# Altium PCB LOAD CONTROL_Final2.PcbDoc (part 2 of 2)
Units mil, origin at the board's own origin, x right, y up, seen from the top; angles counter-clockwise.
Board outline 2032.89 x 4209.34 mil, 2 copper layers (Top Layer, Bottom Layer); 80 components, 51 nets, 252 pads, 95 vias.
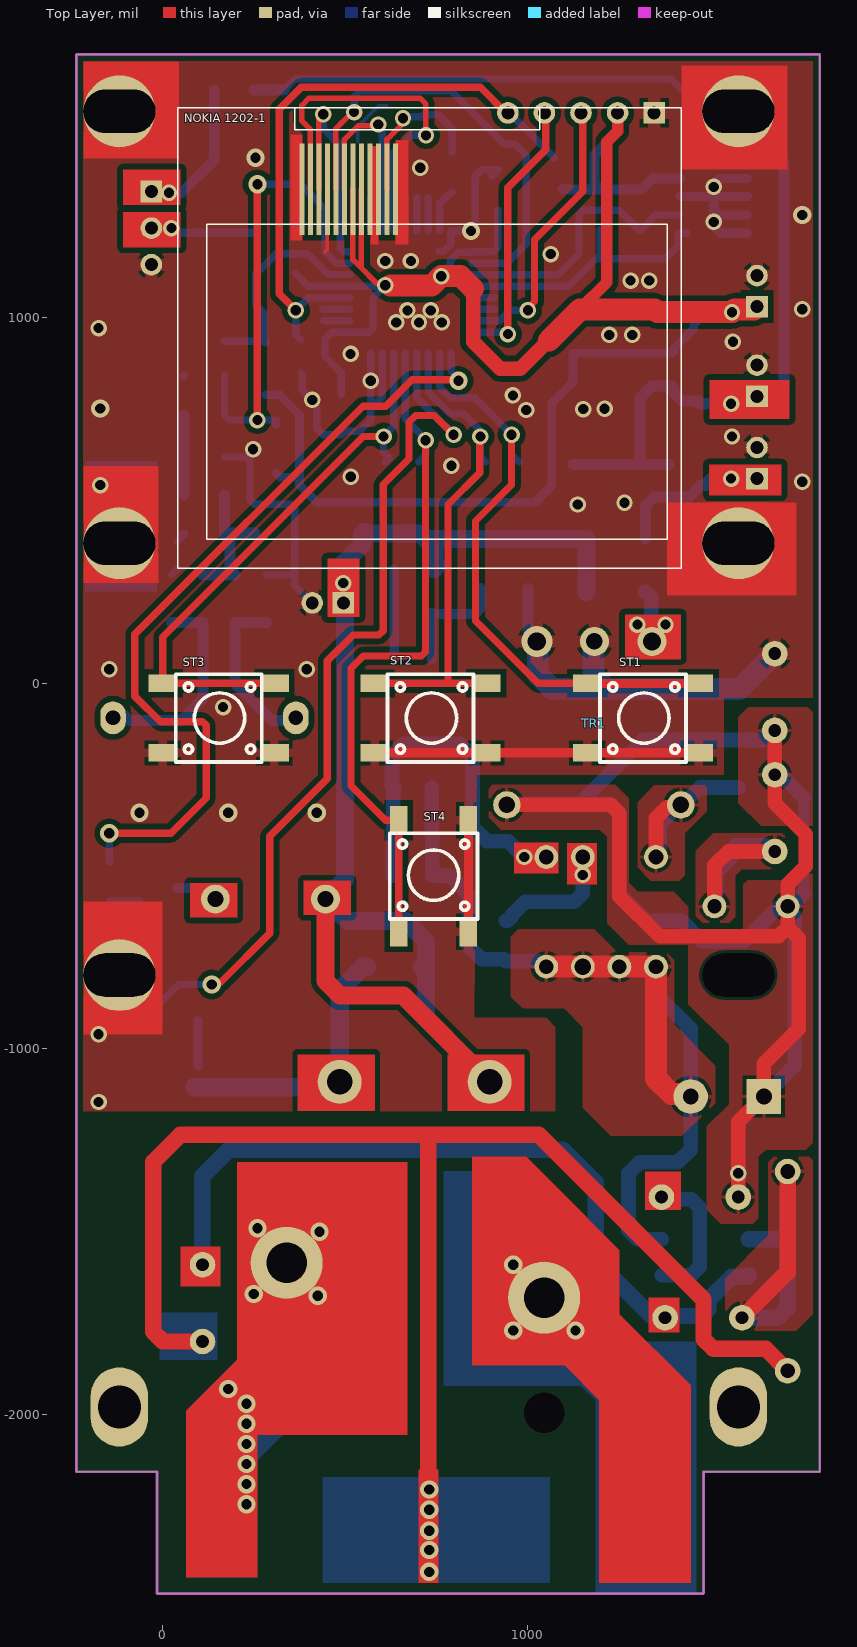
[diagram p0: Top Layer view]

## Other copper (continued)
Top Layer: (continued)
  rectangle net NetBR2_1: 1320,-1440 1418.01,-1335
  rectangle net VDD: 451.41,181.5 539.53,341.65
  rectangle net n: 700,-2460 755,-2150
  rectangle net NetBuzzer_2: 75,-640.66 205,-546.49
  region net VDD: 516.18,-539.33 386.18,-539.33 386.18,-633.51 516.18,-633.51
  rectangle net NetD3_2: 370,-1170 580.98,-1015
  rectangle net VDD: 780,-1170 990.98,-1015
  region net CO: 205,-1310 205,-1850 65,-1990 65,-2445 260,-2445 260,-2055 670,-2055 670,-1310
  region net L: 847.19,-1550 847.19,-1865 1100,-1865 1195,-1960 1195,-2460 1445,-2460 1445,-1920 1250,-1725 1250,-1550
  region net L: 847.19,-1295 995,-1295 1070,-1370 1070,-1585 847.19,-1585
  region net L: 1250,-1565 1250,-1550 1070.05,-1370.05 1025,-1415.1 1025,-1565
Bottom Layer:
  rectangle net n: 437.5,-2460 1060,-2170
  rectangle net GND: -210.92,1445.86 0.22,1695.92
  rectangle net GND: 1513.37,1483.99 1683.86,1674.98
  rectangle net GND: 1478.72,1551.26 1626.28,1674.98
  rectangle net GND: 1455.19,251.4 1716.75,467.53
  rectangle net GND: 1494.94,440.1 1653.89,495.04
  rectangle net GND: -210.92,-823.22 -7.6,-675
  rectangle net GND: -210.91,-948.16 -62.46,-733.46
  rectangle net GND: -210.92,251.69 -14.53,607.38
  rectangle net GND: 1538.72,1475 1683.86,1538.99
  rectangle net n: -7.6,-1850 150.58,-1720
  region net L: 1185,-2489.1 1185,-1960.74 1144.97,-1920.71 770,-1920.71 770,-1335 946.5,-1335 1122.4,-1510.91 1122.4,-1607.4 1315,-1800 1460,-1800 1460,-2489.03
  region net CO: 665,-1340 210,-1340 210,-1850 68.58,-1991.42 68.58,-2443.58 70,-2445 260,-2445 260,-2125 335,-2050 665,-2050
  region net L: 1120,-1627.47 1120,-1510 945,-1335 924.33,-1335

## Silkscreen, mask and mechanical layers (free items; w line width, h text height)
Bottom Overlay:
  drawing of 78 lines, arcs and shapes, not listed
  text "Serial : AR-L0202" at 1361.3,1639.44 h60
  text "+" at -2.44,1460 h120 r270
  text "Load Controller" at 720.22,1404.99 h60
  text "Sensor Input3" at -214.34,1087.72 h60 r270
  text "-" at 11.89,1000.84 h120 r270
  text "Don't Touch" at 103.7,-1507.34 h60
  text "Input" at 1215,-2194.34 h60
  text "Output" at 425,-2206.84 h60
  text "AC" at 1195,-2259.33 h60
  text "MAX" at 400.02,-2270 h60
  text "220v" at 1210.06,-2314.33 h60
  text "20A" at 385.06,-2324.33 h60

## Text inside footprints (layer, text, board x,y; h text height)
BUZZER: Bottom Overlay "+" at 452.09,-550.63 h60